# Altium PCB PCB1.PcbDoc
Units mil, origin at the board's own origin, x right, y up, seen from the top; angles counter-clockwise.
Board outline 6000 x 4000 mil, 2 copper layers (Top Layer, Bottom Layer); 56 components, 53 nets, 227 pads, 0 vias.
Unrouted connection lines stored in the file: 150.
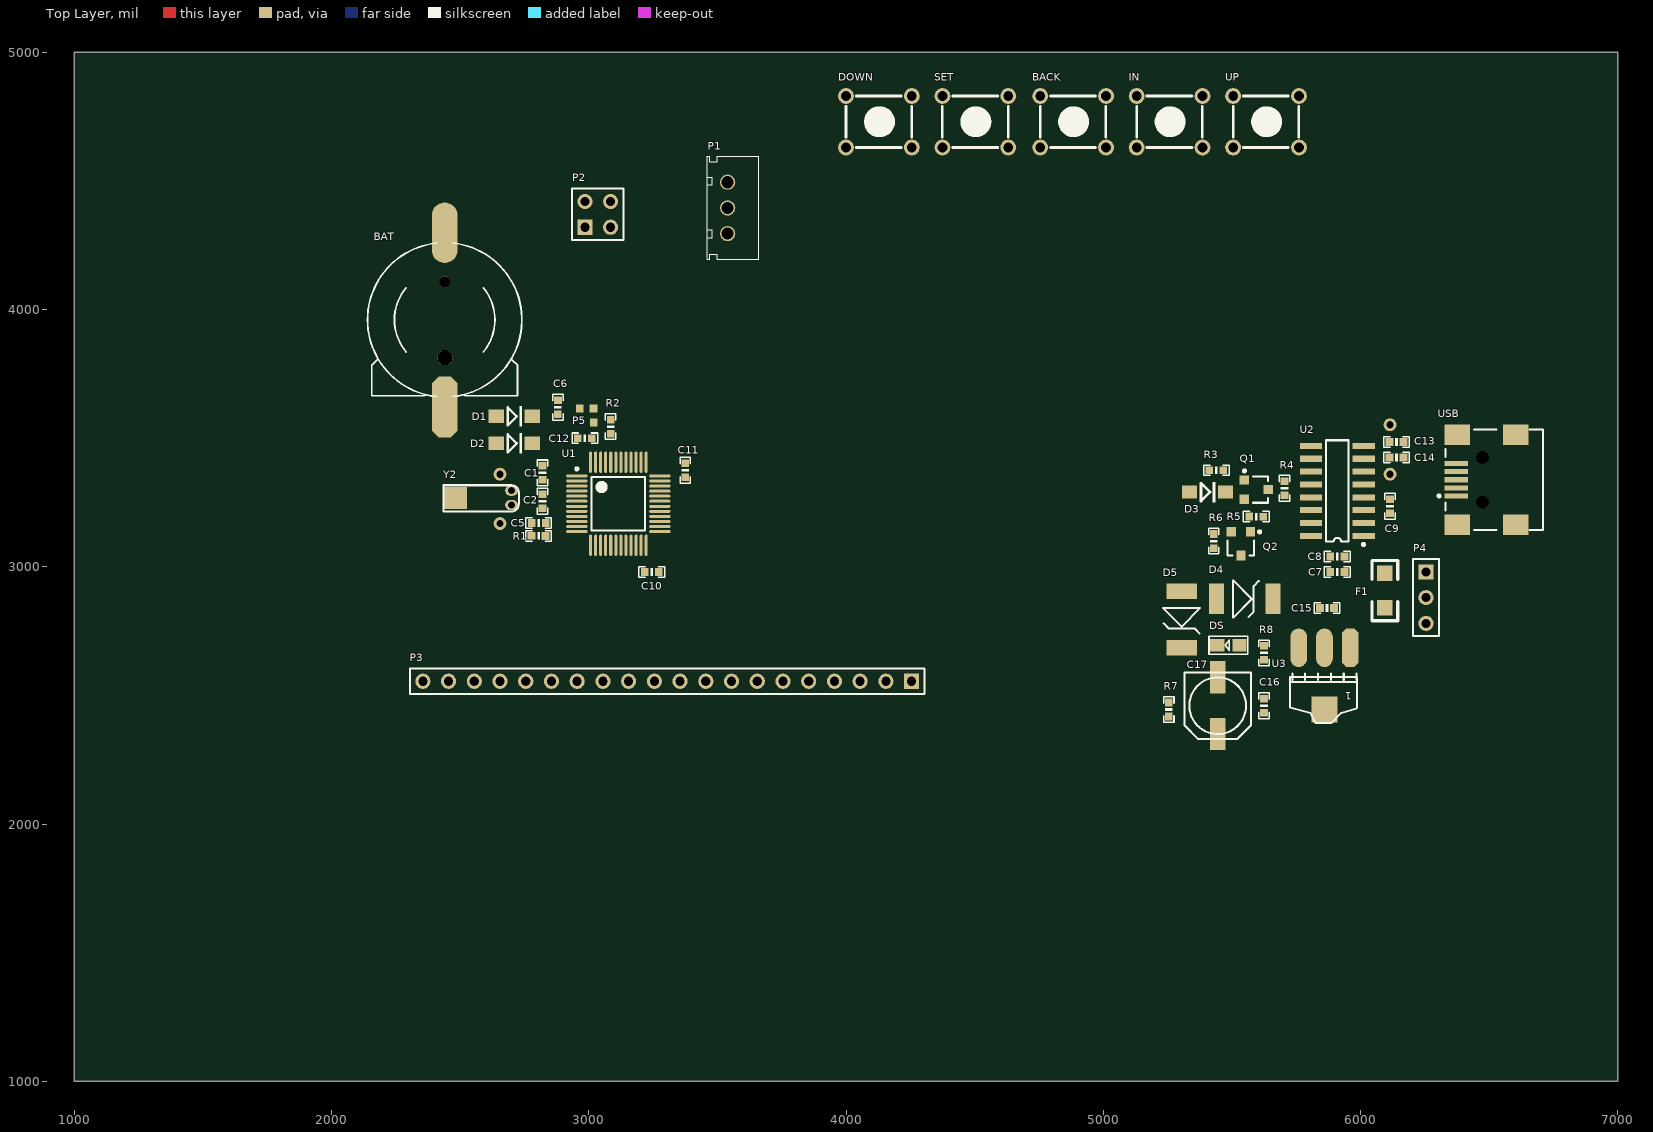
[diagram p0: Top Layer view]
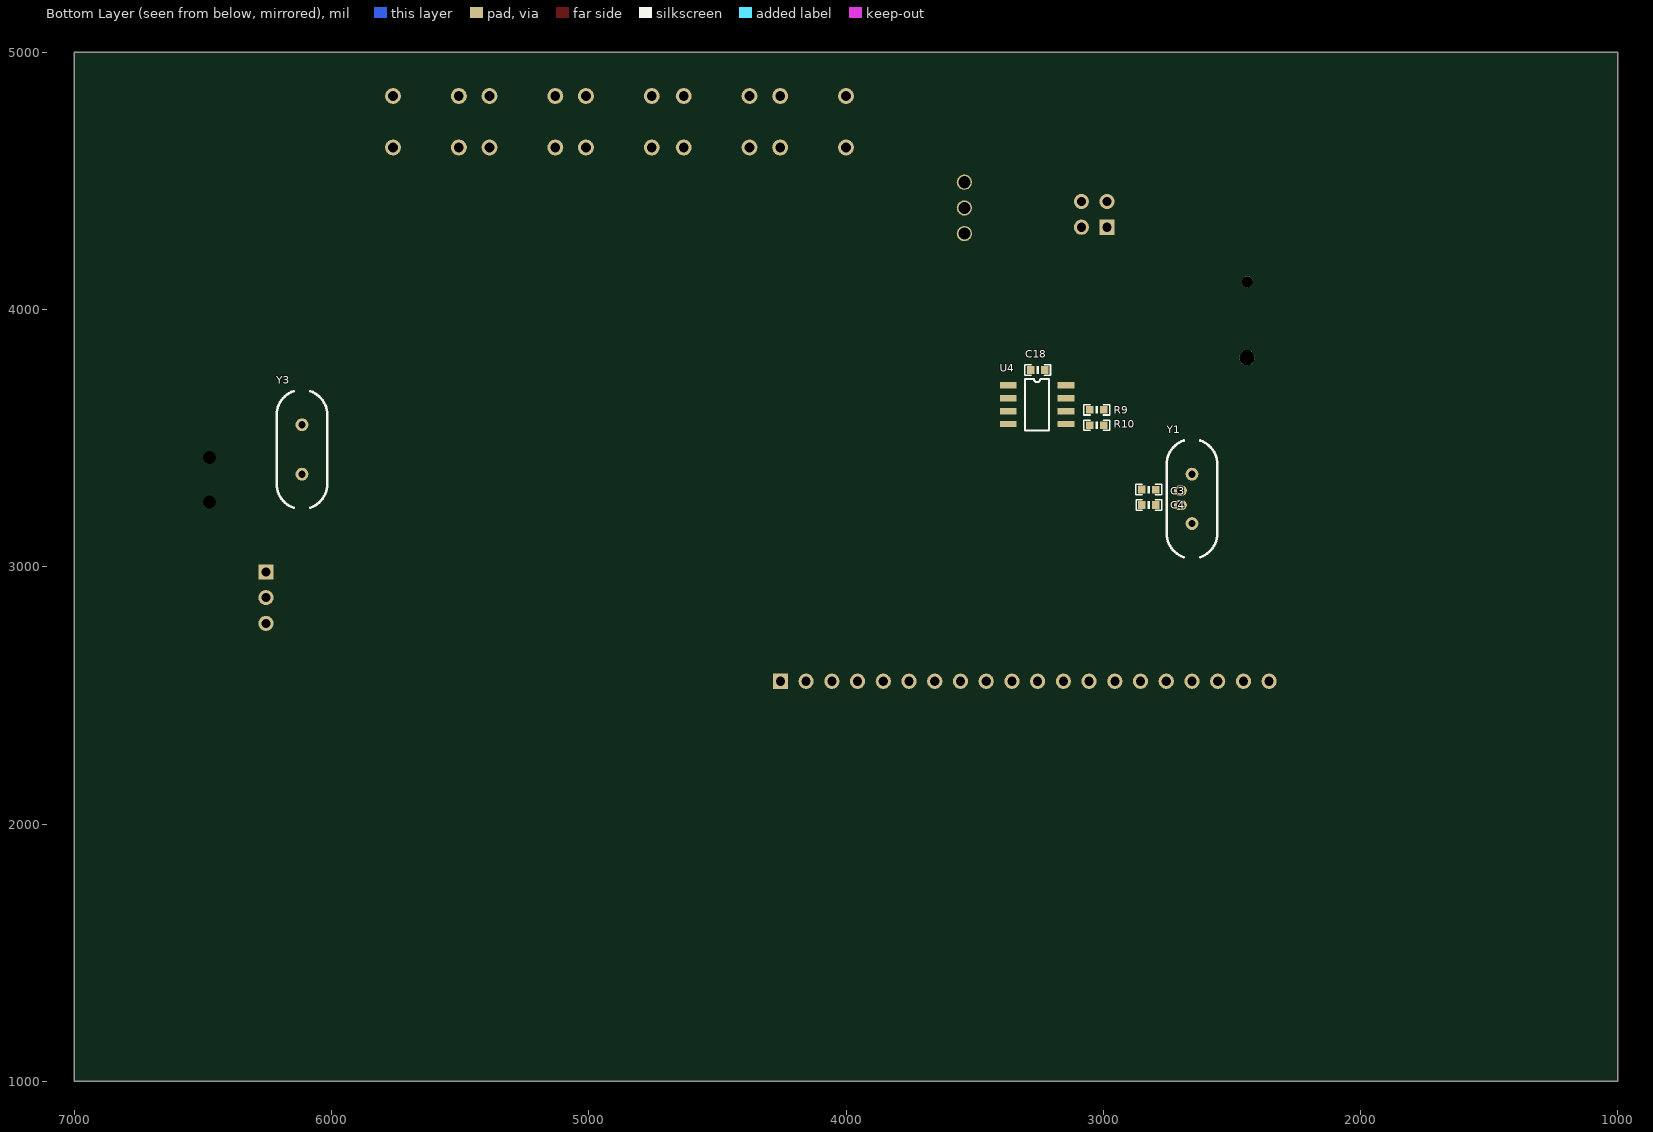
[diagram p1: Bottom Layer view, seen from below]

## Layer stack, top to bottom
Top Solder: solder mask 0.4, Solder Resist, Dk 3.5
Top Layer: signal copper 1.4
Dielectric 1: dielectric 12.6, FR-4, Dk 4.8
Bottom Layer: signal copper 1.4
Bottom Solder: solder mask 0.4, Solder Resist, Dk 3.5

## Board outline
1000,1000 7000,1000 7000,5000 1000,5000

## Design rules (kind name [scope] priority, off if disabled: settings)
Clearance [All] p1: gap=10 ignorepadtopadclearanceinfootprint=FALSE except(0: Arc-Hole Track-Hole SMDPad-Hole THPad-Hole Via-Hole Fill-Hole Poly-Hole Region-Hole Text-Hole)
PolygonConnect [All] p1: connectstyle=Relief reliefconductorwidth=10 reliefentries=4 polygonreliefangle="90 Angle" airgapwidth=10
RoutingVias [All] p1: holewidth=28 width=50 viastyle="Through Hole" minholewidth=28 minwidth=50 maxholewidth=28 maxwidth=50
SolderMaskExpansion [All] p1: expansion=4
Width [All] p1: maxlimit=10 minlimit=10 preferedwidth=10
30 further rules are at their usual default settings.

## Components (designator, comment, footprint, x,y, rotation, side; value= is the part's Value field where it differs from the comment)
BACK "KEY_M" KEY_M 4755,4830 r0 top
BAT "BATT" BATM 2440,3960 r0 top
C1 "Cap" 0603P 2820,3365 r90 top value=22P
C2 "Cap" 0603P 2820,3255 r270 top value=22P
C3 "" 0603p 2823,3300 r180 bottom value=22P
C4 "" 0603p 2822.5,3239.94 r0 bottom value=22P
C5 "104" 0603p 2805,3170 r0 top
C6 "Cap" 0603P 2880,3620 r270 top value=0.1uF
C7 "104" 0603p 5910,2980 r0 top
C8 "10uF" 0603p 5910,3040 r0 top
C9 "Cap" 0603P 6115,3235 r90 top value=104
C10 "104" 0603p 3245,2980 r0 top
C11 "104" 0603p 3375,3375 r90 top
C12 "104" 0603p 2985,3500 r180 top
C13 "Cap" 0603P 6140,3485 r0 top value=22P
C14 "Cap" 0603P 6140,3425 r0 top value=22P
C15 "Cap" 0603P 5870,2840 r180 top value=104
C16 "Cap" 0603P 5625,2460 r270 top value=104
C17 "220uF" CC6.56.5 5445,2459.76 r90 top
C18 "Cap" 0603P 3255,3765 r180 bottom value=104
D1 "1N4148" DIODE_SOP 2640,3585 r0 top
D2 "1N4148" DIODE_SOP 2640,3480 r0 top
D3 "1N4148" DIODE_SOP 5335,3290 r0 top
D4 "SMBJ5.0A" SMBJ 5545,2875 r0 top
D5 "SMBJ5.0A" SMBJ 5305,2800 r270 top
DOWN "KEY_M" KEY_M 4000,4830 r0 top
DS "LED1" SMDLED 5530.03,2694.94 r180 top
F1 "Res2" 1206 6095,2975 r270 top value=1000mA
IN "KEY_M" KEY_M 5130,4830 r0 top
P1 "红外" 座子3pin 3460,4195 r90 top
P2 "SWD" HDR2X2 2985,4320 r0 top
P3 "OLED" HDR1X20 4255,2555 r180 top
P4 "Header 3" HDR1X3 6255,2980 r270 top
P5 "Header 3" 2-1 3005,3615 r0 top
Q1 "S8050" SOT-23R 5590,3300 r270 top
Q2 "S8550" SOT-23R 5535,3095 r180 top
R1 "Res2" 0603p 2805,3120 r180 top value=10K
R2 "Res2" 0603p 3085,3545 r270 top value=10K
R3 "Res2" 0603p 5440,3375 r180 top value=10K
R4 "Res2" 0603p 5705,3305 r270 top value=1K
R5 "Res2" 0603p 5595,3195 r0 top value=1K
R6 "Res2" 0603p 5430,3100 r270 top value=1K
R7 "Res2" 0603P 5255,2445 r90 top value=0
R8 "Res2" 0603p 5625,2665 r90 top value=510
R9 "Res2" 0603P 3025,3610 r180 bottom value=4.7K
R10 "Res2" 0603P 3025,3550 r180 bottom value=4.7K
SET "KEY_M" KEY_M 4375,4830 r0 top
U1 "STM32F103CBT6" LQFP48_M 3115,3245 r0 top
U2 "CH340G" SOP16M 5910,3295 r90 top
U3 "AMS1117-3.3" AMS1117 5960.03,2684.94 r180 top
U4 "24C02" SOP-8 3369.41,3705 r180 bottom
UP "KEY_M" KEY_M 5505,4830 r0 top
USB "USB" USB/SM0.8-6H5 6681.69,3338.39 r0 top
Y1 "8M" XTAL_US 2655,3360 r270 bottom
Y2 "32.768K" XTAL32 2700,3240 r180 top
Y3 "12MHz" XTAL_US 6115,3552.13 r270 bottom

## Footprints (in the part's own frame and the unit in brackets; to place one, negate y for a bottom-side part, rotate by r counter-clockwise, add the part's x,y. Pads: shape width x height; smd on the part's side, far side on the other; paste and mask are expansions set on the pad)
2-1 [mil]
  rect 30x30 smd: 1(-40,0) 2(13.78,0) 3(14,-54)
0603P [mil]
  rect 30x30 smd: 1(-27,0) 2(27.5,-0.06)
  silkscreen extent -50,-20 50,20
0603p [mil]
  rect 30x30 smd: 1(-27,0) 2(27.5,-0.06)
  silkscreen extent -50,-20 50,20
1206 [mil]
  rect 60x60 smd: 1(0,0) 2(135,0)
  silkscreen extent -50,-50 185,50
AMS1117 [mil]
  oct 65x150 smd: 1(0.03,-0.06)
  oval 65x150 smd: 2(100.03,-0.06) 3(200.03,-0.06)
  rect 100x100 smd: 4(100.03,239.94)
  silkscreen extent -26,100 234,293
BATM [mm]
  round 1.1 hole 1.1 unplated: 0(0,3.748)
  round 1.5 hole 1.5 unplated: 0(0.025,-3.752)
  oct 2.5x6 smd: 1(0,-8.602)
  oval 2.5x6 smd: 2(0,8.598)
  silkscreen extent -7.62,-7.58 7.62,7.57
CC6.56.5 [mm]
  rect 3.2x1.5 smd: 1(-2.794,0) 2(2.8,0)
  silkscreen extent -3.3,-3.3 3.3,3.3
DIODE_SOP [mm]
  rect 1.5x1.3 smd: 1(0,0) 2(3.556,0)
  silkscreen extent 1.14,-1.02 2.56,1.02
HDR1X3 [mm] "Connector; Header; 3 Position"
  rect 1.5x1.5 hole 0.9: 1(0,0)
  round 1.5 hole 0.9: 2(2.54,0) 3(5.08,0)
  silkscreen extent -1.27,-1.27 6.35,1.27
HDR1X20 [mm] "Connector; Header; 20 Position"
  rect 1.5x1.5 hole 0.9: 1(0,0)
  round 1.5 hole 0.9: 2(2.54,0) 3(5.08,0) 4(7.62,0) 5(10.16,0) 6(12.7,0) 7(15.24,0) 8(17.78,0) 9(20.32,0) 10(22.86,0) 11(25.4,0) 12(27.94,0) 13(30.48,0) 14(33.02,0) 15(35.56,0) 16(38.1,0) 17(40.64,0) 18(43.18,0) 19(45.72,0) 20(48.26,0)
  silkscreen extent -1.27,-1.27 49.53,1.27
HDR2X2 [mm]
  rect 1.5x1.5 hole 0.9: 1(0,0)
  round 1.5 hole 0.9: 2(0,2.54) 3(2.54,0) 4(2.54,2.54)
  silkscreen extent -1.27,-1.27 3.81,3.81
KEY_M [mil]
  round 62 hole 38: 1(0,0) 1(255.91,0) 2(0,-200) 2(255.91,-200)
  silkscreen extent 0,-200 255,0
LQFP48_M [mm] "Thin QFP, 48-Leads, Body 7x7mm, Pitch 0.5mm, IPC Low Density"
  oval 2.1x0.3 smd: 1(-4.1,2.75) 2(-4.1,2.25) 3(-4.1,1.75) 4(-4.1,1.25) 5(-4.1,0.75) 6(-4.1,0.25) 7(-4.1,-0.25) 8(-4.1,-0.75) 9(-4.1,-1.25) 10(-4.1,-1.75) 11(-4.1,-2.25) 12(-4.1,-2.75) 25(4.1,-2.75) 26(4.1,-2.25) 27(4.1,-1.75) 28(4.1,-1.25) 29(4.1,-0.75) 30(4.1,-0.25) 31(4.1,0.25) 32(4.1,0.75) 33(4.1,1.25) 34(4.1,1.75) 35(4.1,2.25) 36(4.1,2.75)
  oval 0.3x2.1 smd: 13(-2.75,-4.1) 14(-2.25,-4.1) 15(-1.75,-4.1) 16(-1.25,-4.1) 17(-0.75,-4.1) 18(-0.25,-4.1) 19(0.25,-4.1) 20(0.75,-4.1) 21(1.25,-4.1) 22(1.75,-4.1) 23(2.25,-4.1) 24(2.75,-4.1) 37(2.75,4.1) 38(2.25,4.1) 39(1.75,4.1) 40(1.25,4.1) 41(0.75,4.1) 42(0.25,4.1) 43(-0.25,4.1) 44(-0.75,4.1) 45(-1.25,4.1) 46(-1.75,4.1) 47(-2.25,4.1) 48(-2.75,4.1)
  silkscreen extent -4.22,-2.65 2.65,3.57, body extent -3.5,-3.5 3.5,3.5, height 1.6
SMBJ [mm]
  rect 1.5x3 smd: 1(-2.667,0) 2(2.921,0)
  silkscreen extent -1.02,-1.85 1.52,1.83
SMDLED [mm]
  rect 1.4x1.27 smd: 1(0.001,-0.002) 2(2.211,-0.002)
  silkscreen extent -0.8,-0.89 3.01,0.89
SOP16M [mm]
  rect 0.6x2.2 smd: 1(-4.445,-2.6) 2(-3.175,-2.6) 3(-1.905,-2.6) 4(-0.635,-2.6) 5(0.635,-2.6) 6(1.905,-2.6) 7(3.175,-2.6) 8(4.445,-2.6) 9(4.445,2.6) 10(3.175,2.6) 11(1.905,2.6) 12(0.635,2.6) 13(-0.635,2.6) 14(-1.905,2.6) 15(-3.175,2.6) 16(-4.445,2.6)
  silkscreen extent -5.42,-2.72 5,1.1
SOP-8 [mil]
  rect 65x25 smd: 1(0,0) 2(0,-50) 3(0,-100) 4(0,-150) 5(224.41,-150) 6(224.41,-100) 7(224.41,-50) 8(224.41,0)
  silkscreen extent 65,-175 159,25
SOT-23R [mm]
  rect 0.9x0.95 smd: 1(0.95,-1.048) 2(-0.95,-1.048) 3(0,1.302)
  silkscreen extent -1.98,-1.17 1.3,1.3
USB/SM0.8-6H5 [mm]
  rect 2.3x0.5 smd: 1(-7.85,-1.6) 2(-7.85,-0.8) 3(-7.85,0) 4(-7.85,0.8) 5(-7.85,1.6)
  rect 2.5x2 smd: 6(-7.75,4.45) 7(-1.996,4.45) 8(-7.75,-4.45) 9(-1.996,-4.45)
  round 0.6 hole 1.27 unplated: MH1(-5.25,2.2) MH2(-5.25,-2.2)
  silkscreen extent -9.67,-4.95 0.7,4.95
XTAL32 [mil]
  oval 50x40 hole 28: 1(0,0) 2(0,-56)
  rect 92.13x86 smd: ""(220,-27)
  silkscreen extent -28,-77 264,25
XTAL_US [mil]
  round 50 hole 28: 1(0,0) 2(192.13,0)
  silkscreen extent -131,-98 323,98
座子3pin [mm]
  round 1.5 hole 1.2: 1(2.54,-2.032) 2(5.08,-2.032) 3(7.62,-2.032)
  silkscreen extent 0,-5.08 10.16,0

## Part data
BAT: library part BAT
C1 C2 C6 C9 C13 C14 C15 C16 C18: "Capacitor", LatestRevisionDate=17-Jul-2002, LatestRevisionNote="Re-released for DXP Platform.", PackageReference=RAD-0.3, Published=8-Jun-2000, Publisher="Altium Limited"
C3 C4 C5 C7 C8 C10 C11 C12: library part Cap, "Capacitor", LatestRevisionDate=17-Jul-2002, LatestRevisionNote="Re-released for DXP Platform.", PackageDescription="Radial Cap, Thru-Hole; 2 Leads; 0.3 in Pin Spacing", PackageReference=RAD-0.3, Published=8-Jun-2000, Publisher="Altium Limited"
C17: library part CAP
D1 D2 D3: library part D
D4 D5: library part SMBJ, "TVS"
DS: library part LED2, "Typical RED, GREEN, YELLOW, AMBER GaAs LED", PackageDocument=Feb-2002, LatestRevisionDate=17-Jul-2002, LatestRevisionNote="Re-released for DXP Platform.", PackageReference=3.2X1.6X1.1, Published=8-Jun-2000, Publisher="Altium Limited"
F1 R1 R2 R3 R4 R5 R6 R7 R8 R9 R10: "Resistor", LatestRevisionDate=17-Jul-2002, LatestRevisionNote="Re-released for DXP Platform.", PackageReference=AXIAL-0.4, Published=8-Jun-2000, Publisher="Altium Limited"
P1: library part "Header 3", "Header, 3-Pin", LatestRevisionDate=17-Jul-2002, LatestRevisionNote="Re-released for DXP Platform.", Publisher="Altium Limited"
P2: library part "Header 2X2", "Header, 2-Pin, Dual row", LatestRevisionDate=17-Jul-2002, LatestRevisionNote="Re-released for DXP Platform.", Publisher="Altium Limited"
P3: library part "Header 20", "Header, 20-Pin", LatestRevisionDate=17-Jul-2002, LatestRevisionNote="Re-released for DXP Platform.", Publisher="Altium Limited"
P4 P5: "Header, 3-Pin", LatestRevisionDate=17-Jul-2002, LatestRevisionNote="Re-released for DXP Platform.", Publisher="Altium Limited"
Q1: library part NPN, "8050/BCW846/BCW847"
Q2: library part PNP, "8550/BCW68"
U1: "STM32 ARM-based 32-bit MCU Performance Line with 128 kB Flash, 20 kB Internal RAM, -40 to +85癈 Temperature, 48-Pin LQFP, Tray", ComponentLink1Description="Manufacturer URL", ComponentLink1URL=http://www.st.com/, ComponentLink2Description="STM32F103 Datasheet", ComponentLink2URL=http://www.st.com/internet/com/TECHNICAL_RESOURCES/TECHNICAL_LITERATURE/DATASHEET/CD00161566.pdf, ComponentLink3Description="STM32 Family Web Page", ComponentLink3URL=www.st.com/stm32, DatasheetVersion="rev13.0, Apr-2011", PackageDescription="48-Pin Low-Profile Quad Flat Pack, 7 x 7 mm Body, 0.5 mm Pitch (LQFP48)", PackageReference=LQFP48, PackageVersion="rev13, Apr-2011"
U2: "USB2UART"
U3: library part AMS1117
U4: library part 24C256
USB: library part USB5
Y1 Y2 Y3: library part XTAL, "Crystal Oscillator", LatestRevisionDate=17-Jul-2002, LatestRevisionNote="Re-released for DXP Platform.", Published=8-Jun-2000, Publisher="Altium Limited"
  Y1 Y2: PackageDescription="Crystal, Thru-Hole; 2 Leads; Body 3.1 x 8.2 mm (Dia.xH)", PackageReference=R38

## Nets (pads, with @x,y where several pads share a name; then routed paths per layer and width w, separated by ;. In a path a pad name is that pad's centre, name@x,y a point inside that pad or via, vN(x,y) a via of type N, cw(c..) or ccw(c..) an arc to the next point about the centre after c; other vN are vias at no path point)
BOOT0: R2.2 R6.1 U1.44
CH340_D+: U1.33 U2.5 USB.3
CH340_D-: U1.32 U2.6 USB.2
Charge: P4.2
DB0: P3.7 U1.10
DB1: P3.8 U1.11
DB2: P3.9 U1.12
DB3: P3.10 U1.13
DB4: P3.11 U1.14
DB5: P3.12 U1.15
DB6: P3.13 U1.16
DB7: P3.14 U1.17
Dis_Charge: P4.3
E: P3.6 U1.39
EEP_SCL: R9.1 U1.42 U4.6
EEP_SDA: R10.1 U1.43 U4.5
GND: BAT.2 C1.2 C2.2 C3.2 C4.1 C5.1 C6.1 C7.2 C8.2 C9.1 C10.1 C11.1 C12.1 C13.2 C14.2 C15.1 C16.1 C17.2 C18.1 D4.1 D5.1 DS.2 P1.1 P2.3 P3.1 P3.20 P5.3 U1.8 U1.23 U1.35 U1.47 U2.1 U3.1 U4.1 U4.2 U4.3 U4.4 U4.7 USB.5
KEY_BACK: BACK.1 U1.21
KEY_DOWN: DOWN.1 U1.25
KEY_IN: IN.1 U1.46
KEY_SET: SET.1 U1.22
KEY_UP: U1.45 UP.1
NetBAT_1: BAT.1 D1.1
NetC1_1: C1.1 U1.3 Y2.2
NetC2_1: C2.1 U1.4 Y2.1
NetC3_1: C3.1 U1.5 Y1.1
NetC4_2: C4.2 U1.6 Y1.2
NetC6_2: C6.2 D1.2 D2.2 U1.1
NetC9_2: C9.2 U2.4
NetC13_1: C13.1 U2.8 Y3.1
NetC14_1: C14.1 U2.7 Y3.2
NetC16_2: C16.2 C17.1 R7.1 R8.1 U3.2 U3.4
NetD3_2: D3.2 Q1.3 R3.1
NetDS_1: DS.1 R8.2
NetP5_2: P5.2 R2.1
NetQ1_1: Q1.1 R5.2 U2.14
NetQ1_2: Q1.2 R4.1
NetQ2_2: Q2.2 R5.1
NetQ2_3: Q2.3 R6.2
NetR4_2: R4.2 U2.13
NRST: C5.2 D3.1 R1.1 U1.7
PSB: P3.15 U1.20
R/W: P3.5 U1.40
REMOTE_IN: P1.2 U1.18
RS: P3.4 U1.41
RST: P3.17 U1.19
RX: U1.31 U2.2
SWCLK: P2.4 U1.37
SWDIO: P2.2 U1.34
TX: U1.30 U2.3
V_USB: F1.1 P4.1 USB.1
VCC3.3: BACK.2 C10.2 C11.2 C12.2 C18.2 D2.1 D5.2 DOWN.2 IN.2 P2.1 P5.1 Q2.1 R1.2 R3.2 R7.2 R9.2 R10.2 SET.2 U1.9 U1.24 U1.36 U1.48 U4.8 UP.2
VCC5: C7.1 C8.1 C15.2 D4.2 F1.2 P1.3 P3.2 P3.19 U2.16 U3.3
pads on no net: BAT.0 P3.3 P3.16 P3.18 U1.2 U1.26 U1.27 U1.28 U1.29 U1.38 U2.9 U2.10 U2.11 U2.12 U2.15 USB.4 USB.6 USB.7 USB.8 USB.9 USB.MH1 USB.MH2 Y2.

## Text inside footprints (layer, text, board x,y; h text height)
U3: Top Overlay "1" at 5966,2512 h30 r180